# EAGLE board truco_scoreboard (EAGLE 9.7.0)

Size 240.7 x 108.64 mm. Coordinates in mm from the lower left corner, seen from the top.
Outline: 0,0 240.7,0 240.7,108.64 0,108.64 0,0
Copper layers (1*16): Top 0.035mm / dielectric 1.5mm / Bottom 0.035mm
Design rules "default": minimum track width 6mil, minimum drill 0.35mm, track to track 6mil, track to pad 6mil, pad to pad 6mil, via to via 6mil, smd to smd 6mil, copper to edge 40mil, drill to drill 6mil, minimum pad ring 10mil, minimum via ring 8mil, stop-mask expansion 4mil, vias tented up to drill 0mil, thermal gap 10mil

## Footprints (pad centres in the part's own frame; a part is rotated, then mirrored left to right if it is on the bottom)
7SEG-13 = drill 0.813 long: 1 -5.08,-7.62; 2 -2.54,-7.62; 3 0,-7.62; 4 2.54,-7.62; 5 5.08,-7.62; 6 5.08,7.62; 7 2.54,7.62; 8 0,7.62; 9 -2.54,7.62; 10 -5.08,7.62
RESAD1016W63L850D250B = drill 0.83 pad 1.43: 1 -5.08,0; 2 5.08,0
SWITCH-SPDT-PTH-8.5X3.7MM = drill 1.016 pad 1.88: 1 -2.54,0; 2 0,0; 3 2.54,0
SWITCH-MOMENTARY-PTH-6.5MM = drill 1.016 pad 1.88: 1 -3.251,2.261; 2 3.251,2.261; 3 -3.251,-2.261; 4 3.251,-2.261
TO92 = drill 0.813 octagon: 1 -1.27,0; 2 0,1.905; 3 1.27,0
ARDUINO-UNO-R3-SHIELD = drill 1.016 pad 1.88: 3.3V 24.13,-2.54; 5V 24.13,0; A0 24.13,12.7; A1 24.13,15.24; A2 24.13,17.78; A3 24.13,20.32; A4 24.13,22.86; A5 24.13,25.4; AREF -24.13,-13.97; D2 -24.13,20.32; D3 -24.13,17.78; D4 -24.13,15.24; D5 -24.13,12.7; D6 -24.13,10.16; D7 -24.13,7.62; D8 -24.13,3.81; D9 -24.13,1.27; D10 -24.13,-1.27; D11 -24.13,-3.81; D12 -24.13,-6.35; D13 -24.13,-8.89; GND@0 24.13,2.54; GND@1 24.13,5.08; GND@2 -24.13,-11.43; IOREF 24.13,-7.62; NC 24.13,-10.16; RES 24.13,-5.08; RX -24.13,25.4; SCL -24.13,-19.05; SDA -24.13,-16.51; TX -24.13,22.86; VIN 24.13,7.62

## Placement (x,y rotation side)
DIGITDEZENARODADA  7SEG-CK  [7SEG-13]  107.61,89.61 0 top
DIGITDJOG11  7SEG-CK  [7SEG-13]  188.89,89.61 0 top
DIGITDJOG21  7SEG-CK  [7SEG-13]  186.2,24.21 0 top
DIGITUJOG11  7SEG-CK  [7SEG-13]  216.83,89.61 0 top
DIGITUJOG21  7SEG-CK  [7SEG-13]  216.68,24.21 0 top
DIGITUNIDADERODADA  7SEG-CK  [7SEG-13]  143.17,89.61 0 top
R1  120  [RESAD1016W63L850D250B]  148.25,76.91 0 top
R2  120  [RESAD1016W63L850D250B]  112.69,76.91 0 top
R3  120  [RESAD1016W63L850D250B]  107.46,8.97 90 top
R4  120  [RESAD1016W63L850D250B]  145.56,8.97 90 top
R5  470  [RESAD1016W63L850D250B]  120.31,102.31 0 top
R6  470  [RESAD1016W63L850D250B]  155.87,102.31 0 top
R7  120  [RESAD1016W63L850D250B]  122.7,8.97 90 top
R8  470  [RESAD1016W63L850D250B]  198.9,36.91 0 top
R9  470  [RESAD1016W63L850D250B]  229.38,36.91 0 top
R10  120  [RESAD1016W63L850D250B]  191.28,11.51 0 top
R11  120  [RESAD1016W63L850D250B]  221.76,11.51 0 top
R12  120  [RESAD1016W63L850D250B]  221.91,76.91 0 top
R13  120  [RESAD1016W63L850D250B]  193.97,76.91 0 top
R14  470  [RESAD1016W63L850D250B]  229.53,102.31 0 top
R15  470  [RESAD1016W63L850D250B]  201.59,102.31 0 top
R16  120  [RESAD1016W63L850D250B]  97.3,8.97 90 top
R17  120  [RESAD1016W63L850D250B]  158.26,8.97 90 top
R19  120  [RESAD1016W63L850D250B]  132.86,8.97 90 top
S1  TOGGLE  [SWITCH-SPDT-PTH-8.5X3.7MM]  102.38,36.91 0 top
S2  SWITCH_MOMENTARY  [SWITCH-MOMENTARY-PTH-6.5MM]  99.84,20.4 90 top
S3  SWITCH_MOMENTARY  [SWITCH-MOMENTARY-PTH-6.5MM]  160.8,20.4 90 top
S4  SWITCH_MOMENTARY  [SWITCH-MOMENTARY-PTH-6.5MM]  135.4,20.4 90 top
SINCREMENTA  SWITCH_MOMENTARY  [SWITCH-MOMENTARY-PTH-6.5MM]  125.24,20.4 90 top
SJOGADOR2  SWITCH_MOMENTARY  [SWITCH-MOMENTARY-PTH-6.5MM]  148.1,20.4 90 top
STRUCO2  SWITCH_MOMENTARY  [SWITCH-MOMENTARY-PTH-6.5MM]  110,20.4 90 top
T1  NPN  [TO92]  125.39,79.45 0 top
T2  NPN  [TO92]  160.95,79.45 0 top
T3  NPN  [TO92]  203.98,14.05 0 top
T4  NPN  [TO92]  204.13,81.99 0 top
T5  NPN  [TO92]  234.61,81.99 0 top
T6  NPN  [TO92]  234.46,14.05 0 top
U1  ARDUINO-UNO-R3-SHIELD  [ARDUINO-UNO-R3-SHIELD]  47.88,52.51 270 top

## Library data of the parts
DIGITDEZENARODADA DIGITDJOG11 DIGITDJOG21 DIGITUJOG11 DIGITUJOG21 DIGITUNIDADERODADA = Tinkercad; CATEGORY: Opto-Electronic; SUB-CATEGORY: Display; TYPE: 7-Segment
R1-R17 R19 S1-S4 SINCREMENTA SJOGADOR2 STRUCO2 U1 = Tinkercad
T1-T6 = Tinkercad; CATEGORY: Transistor; SUB-CATEGORY: BJT; TYPE: NPN

## Nets
DIGITDEZENARODADA_CK1: DIGITDEZENARODADA.3 R2.1
DIGITDJOG11_CK1: DIGITDJOG11.3 R13.1
DIGITDJOG21_CK1: DIGITDJOG21.3 R10.1
DIGITUJOG11_CK1: DIGITUJOG11.3 R12.1
DIGITUJOG21_CK1: DIGITUJOG21.3 R11.1
DIGITUNIDADERODADA_CK1: DIGITUNIDADERODADA.3 R1.1
T1_B: R5.2 T1.2
T1_C: R2.2 T1.1
T2_B: R6.2 T2.2
T2_C: R1.2 T2.1
T3_B: R8.2 T3.2
T3_C: R10.2 T3.1
T4_B: R15.2 T4.2
T4_C: R13.2 T4.1
T5_B: R14.2 T5.2
T5_C: R12.2 T5.1
T6_B: R9.2 T6.2
T6_C: R11.2 T6.1
U1_5V: S1.1 S2.3 S3.3 S4.3 SINCREMENTA.3 SJOGADOR2.3 STRUCO2.3 U1.5V
U1_A0: R16.2 S2.1 U1.A0
U1_A1: R7.2 SINCREMENTA.1 U1.A1
U1_A2: R4.2 SJOGADOR2.1 U1.A2
U1_A3: R3.2 STRUCO2.1 U1.A3
U1_A4: R17.2 S3.1 U1.A4
U1_A5: R19.2 S4.1 U1.A5
U1_D2: DIGITDEZENARODADA.4 DIGITDJOG11.4 DIGITDJOG21.4 DIGITUJOG11.4 DIGITUJOG21.4 DIGITUNIDADERODADA.4 U1.D2
U1_D3: DIGITDEZENARODADA.2 DIGITDJOG11.2 DIGITDJOG21.2 DIGITUJOG11.2 DIGITUJOG21.2 DIGITUNIDADERODADA.2 U1.D3
U1_D4: DIGITDEZENARODADA.1 DIGITDJOG11.1 DIGITDJOG21.1 DIGITUJOG11.1 DIGITUJOG21.1 DIGITUNIDADERODADA.1 U1.D4
U1_D5: DIGITDEZENARODADA.9 DIGITDJOG11.9 DIGITDJOG21.9 DIGITUJOG11.9 DIGITUJOG21.9 DIGITUNIDADERODADA.9 U1.D5
U1_D6: DIGITDEZENARODADA.10 DIGITDJOG11.10 DIGITDJOG21.10 DIGITUJOG11.10 DIGITUJOG21.10 DIGITUNIDADERODADA.10 U1.D6
U1_D7: S1.2 U1.D7
U1_D8: R15.1 U1.D8
U1_D9: R14.1 U1.D9
U1_D10: R8.1 U1.D10
U1_D11: R9.1 U1.D11
U1_D12: R5.1 U1.D12
U1_D13: R6.1 U1.D13
U1_GND: R3.1 R4.1 R7.1 R16.1 R17.1 R19.1 S1.3 T1.3 T2.3 T3.3 T4.3 T5.3 T6.3 U1.GND@0 U1.GND@1 U1.GND@2
U1_RX: DIGITDEZENARODADA.7 DIGITDJOG11.7 DIGITDJOG21.7 DIGITUJOG11.7 DIGITUJOG21.7 DIGITUNIDADERODADA.7 U1.RX
U1_TX: DIGITDEZENARODADA.6 DIGITDJOG11.6 DIGITDJOG21.6 DIGITUJOG11.6 DIGITUJOG21.6 DIGITUNIDADERODADA.6 U1.TX

## Tracks (layer width: path | path; a pad name or v marks a point on that pad's centre or on a via)
DIGITDEZENARODADA_CK1  (1 unrouted)
DIGITDJOG11_CK1  (1 unrouted)
DIGITDJOG21_CK1  (1 unrouted)
DIGITUJOG11_CK1  (1 unrouted)
DIGITUJOG21_CK1  (1 unrouted)
DIGITUNIDADERODADA_CK1  (1 unrouted)
T1_B  (1 unrouted)
T1_C  (1 unrouted)
T2_B  (1 unrouted)
T2_C  (1 unrouted)
T3_B  (1 unrouted)
T3_C  (1 unrouted)
T4_B  (1 unrouted)
T4_C  (1 unrouted)
T5_B  (1 unrouted)
T5_C  (1 unrouted)
T6_B  (1 unrouted)
T6_C  (1 unrouted)
U1_5V  (7 unrouted)
U1_A0  (2 unrouted)
U1_A1  (2 unrouted)
U1_A2  (2 unrouted)
U1_A3  (2 unrouted)
U1_A4  (2 unrouted)
U1_A5  (2 unrouted)
U1_D2  (6 unrouted)
U1_D3  (6 unrouted)
U1_D4  (6 unrouted)
U1_D5  (6 unrouted)
U1_D6  (6 unrouted)
U1_D7  (1 unrouted)
U1_D8  (1 unrouted)
U1_D9  (1 unrouted)
U1_D10  (1 unrouted)
U1_D11  (1 unrouted)
U1_D12  (1 unrouted)
U1_D13  (1 unrouted)
U1_GND  (15 unrouted)
U1_RX  (6 unrouted)
U1_TX  (6 unrouted)